# Altium PCB PCB1.PcbDoc (part 3 of 3)
Units mil, origin at the board's own origin, x right, y up, seen from the top; angles counter-clockwise.
Board outline 3631 x 2044 mil, 4 copper layers (Top Layer, GND1, GND2, Bottom Layer), stack 62.449 mil thick; 138 components, 90 nets, 471 pads, 514 vias.
Unrouted connection lines stored in the file: 16.
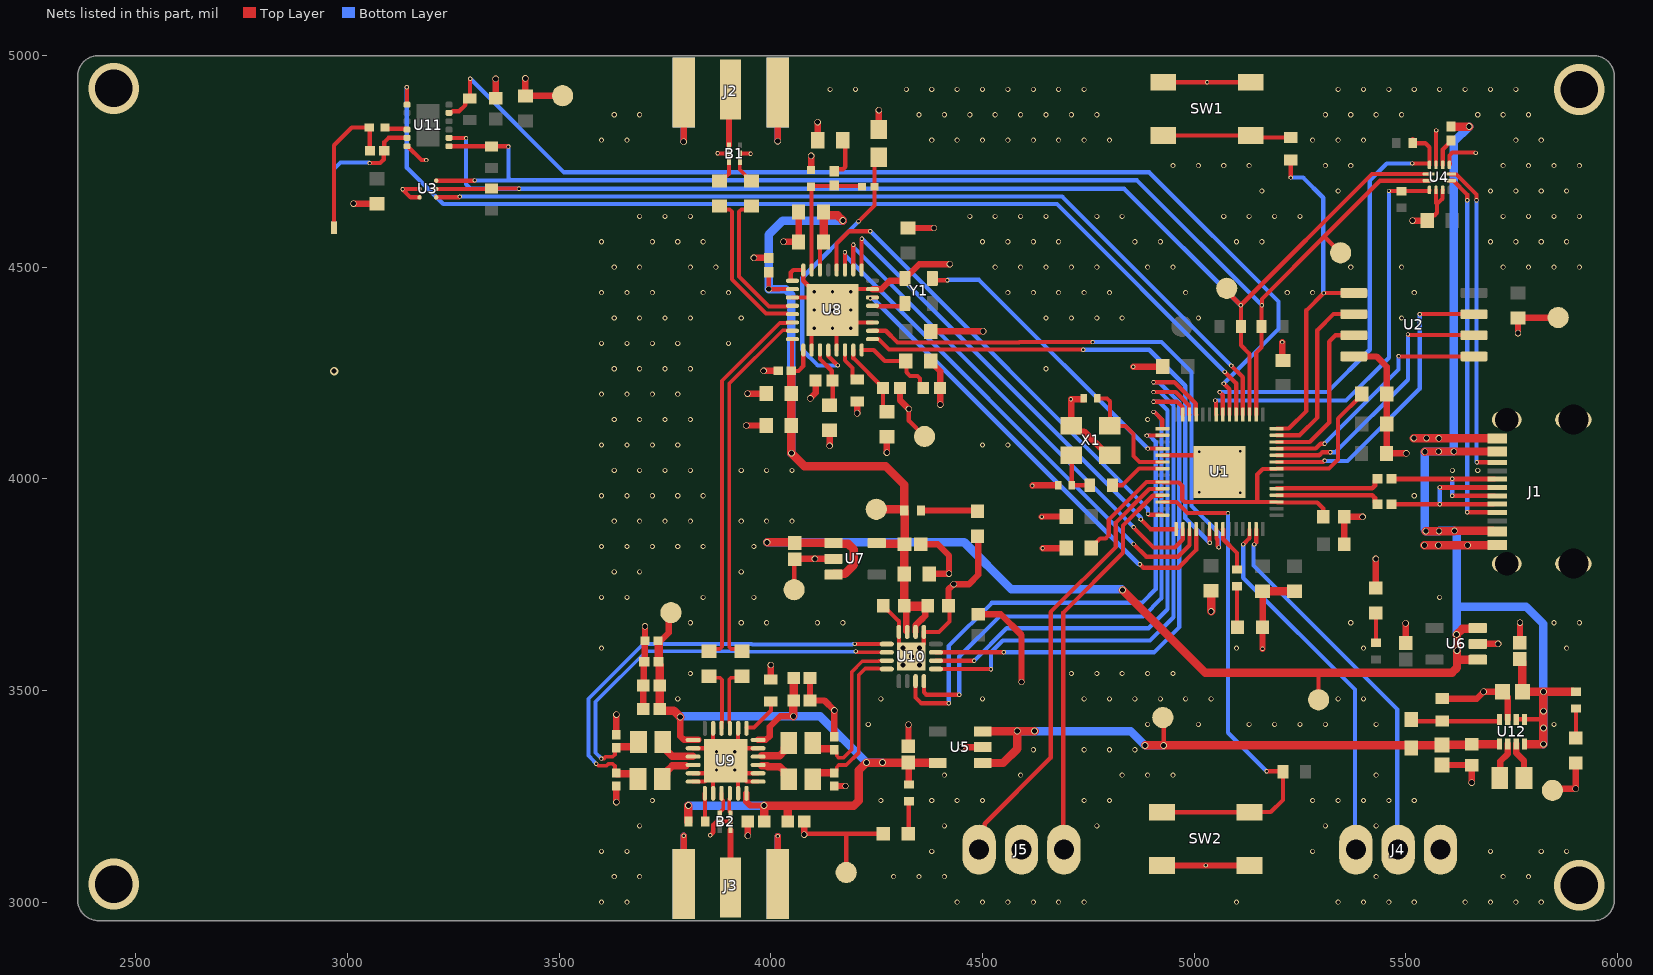
[diagram p4: the nets of this part, all layers, seen from the top]

## Via types
v1: diameter 12, hole 8, Top Layer to Bottom Layer, 299 vias
v2: diameter 10, hole 6, Top Layer to Bottom Layer, 100 vias
v3: diameter 15, hole 12, Top Layer to Bottom Layer, 60 vias
v4: diameter 16, hole 12, Top Layer to Bottom Layer, 32 vias
v5: diameter 19.68, hole 7.87, Top Layer to Bottom Layer, 13 vias
v6: diameter 19.68, hole 11.81, Top Layer to Bottom Layer, 5 vias
v7: diameter 120, hole 88, Top Layer to Bottom Layer, 4 vias
v8: diameter 20, hole 12, Top Layer to Bottom Layer, 1 vias

## Nets (pads, with @x,y where several pads share a name; then routed paths per layer and width w, separated by ;. In a path a pad name is that pad's centre, name@x,y a point inside that pad or via, vN(x,y) a via of type N, cw(c..) or ccw(c..) an arc to the next point about the centre after c; other vN are vias at no path point) (continued)
+3V3A: C23.1 C30.1 C31.1 C32.1 C33.1 C51.1 C52.1 C54.1 C63.2 C64.1 R16.2 TP8.1 U7.5 U8.6 U8.10 U8.16 U8.17 U10.2 U10.3 | length 2341.6
  Top Layer w10: C64.1@3995,4488.13 v4(3995,4448) 4019.01,4448 4019.12,4448.11 U8.10@4051.02,4448.11 ; U8.16@4051.02,4330 4049.77,4330 4049.69,4329.92 4049.69,4256.33 C63.2@4048.35,4255 4065.14,4255 4076.61,4266.47 U8.17@4076.61,4304.41 ; U8.6@4115.98,4493.39 4115.98,4551.46 C33.1@4124.53,4560
  Top Layer w15: C51.1@4315,3700 C51.1@4320.1,3694.9 ; U10.3@4320.1,3640.22 C51.1@4320.1,3694.9 ; U10.2@4341.77,3638.23 4341.77,3653.82 4354.45,3666.5 4354.63,3666.5 4364.64,3676.51 4364.64,3691.51 C54.1@4368.02,3694.9 ; C54.1@4376,3694.9 C54.1@4368.02,3694.9 ; C51.1@4320.1,3694.9 C54.1@4368.02,3694.9
  Top Layer w20: C63.2@4048.51,4253.94 C31.1@4048.51,4201.1 C32.1@4048.51,4126.1 v4(4048.51,4060.49) 4079,4030 4271,4030 4315.31,3985.68 R16.2@4315.31,3925 ; C33.1@4124.53,4560 C30.1@4124.53,4630 ; C30.1@4124.53,4628.03 4130.28,4622.28 4157.72,4622.28 v4(4170,4610) ; TP8.1@4249,3928 4313.97,3928 4315.31,3926.65 R16.2@4315.31,3925 ; U7.5@4250.18,3848.4 4251.88,3846.7 4314.05,3846.7 C23.1@4315.75,3845 ; C54.1@4370.32,3700 C51.1@4315,3700 4315.24,3700.24 4315.24,3774.76 C52.1@4315.47,3775 4315.61,3775.14 4315.61,3844.86 C23.1@4315.75,3845 ; R16.2@4315.31,3925 4315.31,3923.35 4315.75,3922.91 C23.1@4315.75,3845
  Bottom Layer w20: v4(4048.51,4060.49) 4048.51,4434.49 4034.89,4448.11 4015,4448.11 4014.89,4448 v4(3995,4448) 3995,4577 4028,4610 v4(4170,4610)
+5: C17.1 C55.2 C56.2 C57.2 C58.2 C59.2 C60.2 C65.1 C66.2 R15.2 R22.2 TP6.1 U5.5 U9.6 U9.13 U9.24 | length 2033
  Top Layer w15: C66.2@3733.23,3611.57 3734.02,3611.57 3758.94,3636.5 3758.94,3678.94 TP6.1@3764,3684 ; v4@3786,3436.73 3786,3392 3794.79,3383.21 U9.13@3829,3383.21 ; U9.24@3942.21,3257.23 3942.21,3236.98 3951,3228.19 3983.81,3228.19 v4(3984,3228) ; U9.6@3969.77,3383.21 3988.21,3383.21 3997,3392 3997,3414 4022,3439 v4(4053,3439) ; C17.1@4325,3329.75 4325.5,3329.25 4325.5,3278.18 R15.2@4326,3277.68
  Top Layer w20: C66.2@3734.02,3611.57 3734.75,3610.84 C65.1@3734.75,3561.57 ; C65.1@3735.59,3561.57 3737.17,3560 C58.2@3737.17,3511.57 C57.2@3737.17,3456.57 3741.34,3452.4 3770.6,3452.4 v4(3786,3437) ; v4(3805,3228) 3805.32,3227.68 R22.2@3805.32,3190 ; C59.2@3984.29,3190 3984.29,3227.71 v4(3984,3228) 4045,3228 ; C60.2@4040,3190 4040,3223 4045,3228 ; v4(4053,3439) 4053,3475.41 C55.2@4054,3476.41 C56.2@4054,3530 ; U5.5@4393.85,3328.6 4393.28,3329.17 4325.58,3329.17 C17.1@4325,3329.75 v4(4264,3329.75) v4(4225.75,3329.75) 4208,3312 4208,3239.72 4196.28,3228 4045,3228
  Bottom Layer w20: v4(3786,3437) 3788,3439 v4(4053,3439) 4116.5,3439 v4(4225.75,3329.75) v4(4264,3329.75) ; v4(3805,3228) v4(3984,3228)
CC1: J1.A5 U4.1 | length 866.7
  Top Layer w10: U4.1@5605,4704.25 5612.72,4704.25 5645,4671.97 v2(5645,4658) ; v2(5645,3921) 5645.21,3920.79 J1.A5@5707.24,3920.79
  Bottom Layer w10: v2(5645,3921) v2(5645,4658)
CC2: J1.B5 U4.2 | length 754.3
  Top Layer w10: U4.2@5605,4720 5606.06,4718.94 5619.61,4718.94 5667,4671.54 v2(5667,4658) ; v2(5668,4039) 5668.1,4038.9 J1.B5@5707.24,4038.9
  Bottom Layer w10: v2(5667,4658) 5667,4040 v2(5668,4039)
cpout: C34.1 C35.1 R18.1 U8.7 | length 320.2
  Top Layer w10: U8.7@4096.3,4493.39 4096.22,4493.46 4096.22,4689.09 C35.1@4095,4690.31 4096.41,4691.72 4148.59,4691.72 C34.1@4150,4693.13 4151.56,4691.56 4213.67,4691.56 R18.1@4215.24,4690
flash_cs: R7.1 U1.56 U2.1 | length 817.4
  Top Layer w10: U1.56@5195.12,4118.6 5223.6,4118.6 5265,4160 5265,4398 v2(5306,4439) U2.1@5377.25,4439.05 ; v2(5228.35,4711.53) R7.1@5228.35,4752.89
  Bottom Layer w10: v2(5228.35,4711.53) 5257.47,4711.53 5305,4664 5305,4440 v2(5306,4439)
GND: B1.2 B1.5 B2.2 B2.5 C1.2 C2.2 C3.2 C4.2 C5.2 C6.2 C7.2 C8.2 C9.2 C10.2 C11.2 C12.2 C13.2 C14.2 C15.2 C16.2 C17.2 C18.2 C19.2 C20.2 C21.2 C22.2 C23.2 C28.2 C29.2 C30.2 C31.2 C32.2 C33.2 C35.2 C36.2 C37.2 C38.1 C39.2 C40.1 C41.2 C42.1 C44.2 C46.2 C47.1 C48.1 C49.1 C50.1 C51.2 C52.2 C53.2 C54.2 C55.1 C56.1 C57.1 C58.1 C59.1 C60.1 C61.2 C62.2 C63.1 C64.2 C65.2 C66.1 D1.1 D2.1 D3.1 D4.1 D5.1 J1.1 J1.2 J1.3 J1.4 J1.A1-B12 J1.B1-A12 J2.2 J2.3 J2.4 J2.5 J3.2 J3.3 J3.4 J3.5 J4.1 J5.2 R2.2 R19.1 R20.1 R24.1 SW1.3 SW1.4 SW2.3 SW2.4 TP2.1 TP9.1 TP10.1 TP11.1 TP12.1 TP13.1 U1.19 U1.57 U2.4 U3.B1 U3.C1 U4.3 U4.5 U4.10 U4.11 U5.2 U6.2 U7.2 U8.8 U8.9 U8.11 U8.18 U8.21 U8.27 U8.31 U8.33 U9.1 U9.2 U9.5 U9.8 U9.11 U9.14 U9.17 U9.18 U9.20 U9.23 U9.25 U10.1 U10.4 U10.17 U11.6 U12.7 X1.2 X1.4 Y1.2 | length 8960.5
  Top Layer w10: U11.6@3140.39,4785.79 3141.77,4785.79 3174.56,4753 v2(3186,4753) ; U3.C1@3170,4665 3149,4665 v2(3130,4684) 3130.68,4684.69 U3.B1@3170,4684.69 ; U9.18@3816.23,3284.79 3816.31,3284.87 3843.87,3284.87 U9.25@3863.47,3304.47 ; U9.17@3816.23,3304.47 U9.25@3863.47,3304.47 ; U9.14@3816.23,3363.53 3863.47,3363.53 U9.11@3863.47,3410.77 ; v2(3857,3158) 3863.88,3164.88 3863.88,3182.49 3871.63,3190.24 3879.33,3190.24 B2.5@3879.41,3190.32 B2.2@3905,3190.32 ; U9.20@3863.47,3257.23 U9.25@3863.47,3304.47 ; v2(3874,4769) 3874.49,4768.51 B1.2@3901.1,4768.51 ; U9.25@3893,3334 U9.25@3922.53,3304.47 ; U9.23@3922.53,3257.23 U9.25@3922.53,3304.47 ; U9.8@3922.53,3410.77 3922.53,3363.53 U9.5@3969.77,3363.53 ; B1.5@3926.69,4768.51 3951.49,4768.51 v2(3952,4768) ; C59.1@3945.55,3190.16 C59.1@3945.71,3190 ; U9.1@3969.77,3284.79 3969.69,3284.87 3942.13,3284.87 U9.25@3922.53,3304.47 ; U9.2@3969.77,3304.47 U9.25@3922.53,3304.47 ; U8.11@4051.02,4428.43 U8.33@4115.98,4428.43 ; U8.9@4051.02,4467.8 4047.08,4467.8 4047,4467.87 4047,4487.53 4052.86,4493.39 U8.8@4076.61,4493.39 4076.61,4467.8 v5(4102.2,4442.2) U8.33@4115.98,4428.43 ; TP11.1@4055,3738 4055,3809 C22.2@4056,3810 ; v3(4078.58,3159.42) 4079.54,3160.37 4083.07,3160.37 4084.12,3161.42 D3.1@4265.75,3161.42 ; U8.18@4096.3,4304.41 4096.3,4349.69 v5(4102.2,4355.59) ; v5(4145.51,4398.9) U8.33@4115.98,4428.43 ; U8.21@4155.35,4304.41 4155.35,4389.06 4175.04,4369.37 U8.27@4240,4369.37 ; TP9.1@4178,3070 4178,3158.36 ; v5(4188.82,4442.2) 4194.72,4448.11 U8.31@4240,4448.11 ; C51.2@4265.63,3700 4265.63,3698.94 4275.55,3689.01 4276.62,3689.01 4302.4,3663.23 U10.4@4302.4,3638.23 4302.6,3638.03 4302.6,3609.49 v6(4312.24,3599.84) ; v3(4326,4165) 4326,4137 TP10.1@4363,4100 ; v6(4351.61,3599.84) 4361.26,3609.49 4361.26,3638.03 U10.1@4361.46,3638.23 4397.23,3638.23 4422,3663 4422,3697.68 C54.2@4419.68,3700 ; U1.19@4924.65,4055.61 U1.57@5020.51,4055.61 ; SW1.4@4927.17,4937.01 v2(5030.51,4937.01) SW1.3@5133.86,4937.01 ; v2(5012.24,4064) 5012.24,4063.88 U1.57@5020.51,4055.61 ; v2(5059.88,4016.24) U1.57@5020.51,4055.61 ; C62.2@5550.47,4610.26 5550.47,4611.97 5561.22,4622.72 5568.14,4622.72 5574,4628.57 5574,4648.86 ; U4.10@5571.54,4682.6 5571.54,4651.32 5574,4648.86 ; U4.5@5571.54,4741.65 5571.54,4822.54 v2(5572,4823) ; U4.11@5587.28,4682.6 5587,4682.31 5587,4661.86 5574,4648.86 ; U4.3@5604.09,4745 5603.03,4743.94 U4.3@5603.03,4741.65 5603.03,4764.03 5610,4771 5664,4771 v2(5665,4770)
  Top Layer w15: v3(3014,4650) C61.2@3069.37,4650 ; C44.2@3350,4899.37 v3(3350,4945) ; v3(3420,4946) C46.2@3420,4904.53 3420.24,4904.76 3507.76,4904.76 TP12.1@3508,4905 ; v3(3635,3236) C49.1@3635,3274.29 ; C50.1@3635,3395.71 v3(3635,3443) ; C57.1@3698.58,3456.57 C58.1@3698.58,3511.57 3699.79,3512.78 3699.79,3560.37 3701.76,3562.33 3701.76,3610.82 3702.52,3611.57 v3(3702.52,3651.48) ; J3.2@3793.78,3042.87 3793.78,3156.78 v2(3794,3157) ; v3(3793.78,4796.22) J2.3@3793.78,4912.13 ; v3(3941.9,4126.1) C32.2@3989.46,4126.1 ; v3(3944.9,4201.1) C31.2@3989.46,4201.1 ; v3(3945.71,3156.71) C59.1@3945.71,3190 ; v3(3959.87,4521.87) C64.2@3995,4521.87 ; v3(3983,4255) C63.1@4017.65,4255 ; R24.1@4000,3525.59 v3(4000,3560) ; v2(4016,3156) 4016.22,3155.78 J3.3@4016.22,3042.87 ; v3(4016.22,4797.78) J2.2@4016.22,4912.13 ; v3(4030,4560) C33.2@4065.47,4560 C30.2@4065.47,4630 ; C22.2@4056,3810 4057,3811 v3(4104,3811) U7.2@4147.82,3811 ; v3(4078.58,3159.42) C60.1@4078.58,3190 ; C56.1@4092.58,3530 C55.1@4092.58,3476.41 4126.59,3476.41 v3(4150,3453) C48.1@4150,3390.35 ; v3(4093,4190) 4105.92,4202.92 C38.1@4105.92,4232 ; C35.2@4095,4729.69 v3(4095,4762.84) ; R20.1@4110.47,4800 v3(4110.47,4842.47) ; v3(4138.9,4077.9) C37.2@4138.9,4114.46 ; C47.1@4150,3274.29 v3(4176.29,3274.29) ; v3(4203.9,4154.9) R19.1@4203.9,4182.92 ; U8.31@4240,4448.11 4261.19,4448.11 4281.12,4468.04 Y1.2@4316.42,4468.04 ; C36.2@4255,4825.1 v3(4255,4871) ; v3(4273.9,4061.9) C41.2@4273.9,4098.98 ; C42.1@4305,4215 4305,4186 v3(4326,4165) ; Y1.2@4316.42,4472.96 4350.46,4507 v3(4423,4507) ; C29.2@4324,4592.53 v3(4385.47,4592.53) ; C17.2@4325,3368.25 v3(4325,3419) ; C23.2@4354.25,3845 4394,3845 4421,3818 v3(4421,3776) 4375.53,3776 C52.2@4374.53,3775 ; C39.2@4377.95,4278.51 4377.95,4276.54 4400.16,4254.34 C40.1@4400.16,4215 v3(4400.16,4175.16) ; C28.2@4377.95,4348.51 v3(4501.49,4348.51) ; C54.2@4419.68,3700 4419.68,3738.68 v3(4432,3751) 4467.97,3751 4490,3773.03 4490,3862.36 D4.1@4488.19,3864.17 ; v3(4450,3366) U5.2@4500.15,3366 ; C53.2@4490,3679.68 4543.32,3679.68 4592,3631 v3(4592,3520) ; v2(4618,3984) 4619,3985 C15.2@4679.25,3985 ; v2(4640,3910) 4641,3911 C4.2@4698,3911 ; v2(4642,3836) C11.2@4698,3836 ; C14.2@4739.25,4190 4739.25,4188.37 4738.88,4188 v2(4709,4188) 4710,4187 X1.2@4710,4125 4723.17,4111.83 4739.9,4111.83 4795.63,4056.1 X1.4@4800.55,4056.1 ; v2(4856,4265) C3.2@4925.47,4265 ; SW2.3@4924.21,3086.61 v2@5026.42,3086.61 ; v2(5027.56,3086.61) v2@5026.42,3086.61 ; SW2.4@5130.91,3086.61 v2@5026.42,3086.61 ; v2(5161.42,3598.43) D1.1@5161.42,3649.61 5161.71,3649.9 5161.71,3734.18 C6.2@5162,3734.47 ; v2(5208,4323) 5208,4281.53 C2.2@5210,4279.53 ; C9.2@5355,3845 5354.68,3845.32 5354.68,3909.68 C10.2@5354.37,3910 v3(5398,3910) ; U2.4@5377.25,4289.05 5430.95,4289.05 5455,4265 C12.2@5455,4200 C8.2@5455,4130 5454.76,4129.76 5454.76,4060.24 C7.2@5454.53,4060 v3(5501,4060) ; D5.1@5429.13,3742.13 v3(5429.13,3811.02) ; C21.2@5499.69,3611.79 v3(5499.69,3658.68) ; v3(5515.84,4610) C62.2@5550.47,4610 ; C18.2@5585.8,3324.32 5586.32,3323.8 5655.28,3323.8 C19.2@5655.8,3323.28 v3(5655.8,3282.2) ; R2.2@5586,3480.64 5667.64,3480.64 v3(5684,3497) C16.2@5728.36,3497 5740.96,3484.37 U12.7@5740.96,3431.91 ; U6.2@5670,3610 v3(5718,3610) ; v3(5765,4344) C13.2@5765,4380 5765.5,4380.5 5859.5,4380.5 TP13.1@5860,4381 ; C20.2@5769.69,3612.54 v3(5769.69,3660.32) ; TP2.1@5846.46,3263.78 5850.39,3267.72 v3(5901.57,3267.72) D2.1@5901.57,3328.74
  Top Layer w20: v3(5040,3687) C5.2@5040,3735.47 ; C6.2@5162,3734.47 C1.2@5237,3734.47 ; v3(5519,4096) v3(5549,4096) 5549.53,4095.47 v3(5578,4095.47) ; v3(5544,3843) v3(5577,3843) v3(5646.25,3843) 5715.5,3843 J1.A1-B12@5716,3843.5 ; v3@5578.3,4095.47 J1.B1-A12@5716,4095.47
  Bottom Layer w15: J3.4@3793.78,3042.87 3793.78,3156.78 v2(3794,3157) ; v3(3793.78,4796.22) J2.5@3793.78,4912.13 ; v2(4016,3156) 4016.22,3155.78 J3.5@4016.22,3042.87 ; v3(4016.22,4797.78) J2.4@4016.22,4912.13
  other v1: 3600,3000 3660,3000 4440,3000 4500,3000 4560,3000 4620,3000 4680,3000 4740,3000 5100,3000 5340,3000 5400,3000 5460,3000 5520,3000 5640,3000 5700,3000 5760,3000 5820,3000 3630,3060 3690,3060 4290,3060 4350,3060 4410,3060 5430,3060 5730,3060 5790,3060 3600,3120 3660,3120 4380,3120 5280,3120 5700,3120 5820,3120 5880,3120 3690,3180 4410,3180 4770,3180 5310,3180 5430,3180 3720,3240 4260,3240 4380,3240 4440,3240 4500,3240 4740,3240 4800,3240 5280,3240 5340,3240 5400,3240 5460,3240 5520,3240 4410,3300 4590,3300 4830,3300 4890,3300 4950,3300 5430,3300 4620,3360 4740,3360 4800,3360 4860,3360 4230,3420 4890,3420 5010,3420 5130,3420 5190,3420 5250,3420 5310,3420 5430,3420 5850,3420 3780,3480 4260,3480 4500,3480 4740,3480 4800,3480 4860,3480 4920,3480 4980,3480 5040,3480 5340,3480 5400,3480 3810,3540 4710,3540 4770,3540 4830,3540 4890,3540 4950,3540 3600,3600 5100,3600 5400,3600 5880,3600 3810,3660 3930,3660 3990,3660 4110,3660 4170,3660 5370,3660 5850,3660 5910,3660 3600,3720 3660,3720 3840,3720 3960,3720 5580,3720 3630,3780 3690,3780 3930,3780 3600,3840 3660,3840 3720,3840 3780,3840 3840,3840 3960,3840 3630,3900 3690,3900 3750,3900 3810,3900 3930,3900 3990,3900 4050,3900 3600,3960 3660,3960 3720,3960 3780,3960 3840,3960 5520,3960 3630,4020 3690,4020 3750,4020 3810,4020 3930,4020 3990,4020 4050,4020 5610,4020 5670,4020 3600,4080 3660,4080 3720,4080 3780,4080 4500,4080 4560,4080 3630,4140 3690,4140 3750,4140 3810,4140 4890,4140 3600,4200 3660,4200 3720,4200 3780,4200 3630,4260 3690,4260 3750,4260 3810,4260 4650,4260 3600,4320 3660,4320 3720,4320 3780,4320 3900,4320 3630,4380 3690,4380 3750,4380 3810,4380 3930,4380 4650,4380 4710,4380 4770,4380 4830,4380 5010,4380 5490,4380 3600,4440 3660,4440 3720,4440 3840,4440 3900,4440 4560,4440 4620,4440 4680,4440 4740,4440 4800,4440 4980,4440 5220,4440 5280,4440 5520,4440 3630,4500 3690,4500 3810,4500 3870,4500 4530,4500 4590,4500 4650,4500 4710,4500 4770,4500 4890,4500 4950,4500 5370,4500 5490,4500 5730,4500 5790,4500 5850,4500 5910,4500 3600,4560 3720,4560 3780,4560 3840,4560 4500,4560 4560,4560 4620,4560 4680,4560 4860,4560 4920,4560 5100,4560 5160,4560 5700,4560 5760,4560 5820,4560 5880,4560 3690,4620 3750,4620 3810,4620 4470,4620 4530,4620 4590,4620 4650,4620 4770,4620 4830,4620 5070,4620 5130,4620 5190,4620 5250,4620 5730,4620 5790,4620 5850,4620 5910,4620 5160,4680 5340,4680 5700,4680 5760,4680 5820,4680 5880,4680 4950,4740 5010,4740 5070,4740 5130,4740 5310,4740 5370,4740 5730,4740 5790,4740 5850,4740 5910,4740 3600,4800 3660,4800 4380,4800 4440,4800 4500,4800 4560,4800 4620,4800 4680,4800 4740,4800 4800,4800 5280,4800 5340,4800 5400,4800 5760,4800 5820,4800 3630,4860 3690,4860 4350,4860 4410,4860 4470,4860 4530,4860 4590,4860 4650,4860 4710,4860 4770,4860 5310,4860 5370,4860 5430,4860 5490,4860 5670,4860 5730,4860 5790,4860 4140,4920 4200,4920 4320,4920 4380,4920 4440,4920 4500,4920 4560,4920 4620,4920 4680,4920 4740,4920 5340,4920 5400,4920 5460,4920 5520,4920 5580,4920 5640,4920 5700,4920 5760,4920
  other v2: 5109,3967.12 5012.24,3968 5108.65,4065
  other v5: 3871.57,3312.19 3914.88,3312.19 3871.57,3355.5 3914.88,3355.5 4145.51,4355.59 4188.82,4355.59 4102.2,4398.9 4188.82,4398.9 4145.51,4442.2
  other v6: 4312.24,3560.47 4351.61,3560.47 4331.93,3580.16
  other v7: 5910,3040 2447.59,3042.42 5910,4920 2447.59,4922.42
I_N: C48.2 L4.2 U10.7 | length 420.4
  Top Layer w8.86: L4.2@4099.22,3376 4099.22,3375.02 4112.42,3361.82 L4.2@4114.59,3359.65 ; C48.2@4150,3359.65 4155.81,3353.84 4155.81,3345.94 4161,3340.75 4171.16,3340.75 4191,3360.59 4191,3543.84 4216.06,3568.9 4254.32,3568.9 4255.32,3569.9 4273.44,3569.9 U10.7@4273.86,3570.31
  Top Layer w17.7: L4.2@4099.22,3375.02 4099.22,3372.77 4110.17,3361.82 4112.42,3361.82 4148.61,3361.82 4150,3360.43 C48.2@4150,3359.65
I_O_N: L4.1 U9.4 | length 102.5
  Top Layer w8.86: L4.1@4026.67,3360.63 L4.1@4042.04,3376
  Top Layer w17.7: U9.4@3979,3345.6 3990.16,3345.6 3990.41,3345.85 4020.72,3345.85 4031.09,3356.22 4031.09,3365.05 L4.1@4042.04,3376
I_O_P: L2.1 U9.3 | length 103.2
  Top Layer w8.86: L2.1@4026.67,3305.37 L2.1@4042.04,3290
  Top Layer w17.7: U9.3@3979,3322.09 3990.97,3322.09 3992.9,3320.15 4020.72,3320.15 4031.09,3309.78 4031.09,3300.95 L2.1@4042.04,3290
I_P: C47.2 L2.2 U10.8 | length 419.3
  Top Layer w8.86: L2.2@4099.22,3290 L2.2@4114.22,3305 ; C47.2@4150,3305 4155.81,3310.81 4155.81,3318.7 4161,3323.89 4178.15,3323.89 4207.86,3353.61 4207.86,3536.86 4223.04,3552.04 4254.32,3552.04 4255.32,3551.04 4273.44,3551.04 U10.8@4273.86,3550.63
  Top Layer w17.7: L2.2@4099.22,3290 4099.22,3294.05 4110.17,3305 4114.22,3305 C47.2@4150,3305
IQ_EN_N: R24.2 U9.7 | length 100.4
  Top Layer w10: U9.7@3942.52,3412.35 3960,3412.35 4000.43,3452.79 4000.43,3471.25 R24.2@4005.59,3476.41
NetANT1_1: ANT1.1 C43.2 C45.1 C45.2 U11.5 | length 718.4
  Top Layer w10: ANT1.1@2968,4593 2968,4788 3010,4830 C43.2@3051.3,4830 3052.21,4829.09 3052.21,4775.91 C45.2@3053.13,4775 C45.2@3053.97,4775 ; v2(3052,4746) 3077,4746 3085.59,4754.59 3085.59,4773.72 C45.1@3086.87,4775 3086.87,4795.87 3096.47,4805.47 U11.5@3140.39,4805.47
  Bottom Layer w10: ANT1.1@2968,4593 2968,4732 2983,4747 3051,4747 v2(3052,4746)
  other v8: 2968,4254.42
NetB1_1: B1.1 J2.1 | length 133.4
  Top Layer w13.75: B1.1@3901.1,4788.2 3901.1,4916.1 J2.1@3905,4920
NetB1_3: B1.3 C25.2 | length 57.8
  Top Layer w8.86: C25.2@3878.9,4703.51 3890.22,4714.83 3895.91,4714.83 3901.1,4720.02 B1.3@3901.1,4748.83
NetB1_4: B1.4 C24.2 | length 57.7
  Top Layer w8.86: B1.4@3926.69,4748.83 3926.69,4730.72 3940.61,4716.8 3940.61,4714.83 3951.93,4703.51 C24.2@3953.9,4703.51
NetB2_1: B2.1 J3.1 | length 135.6
  Top Layer w13.75: J3.1@3905,3035 B2.1@3905,3170.63
NetC10_1: C10.1 C11.1 C12.1 U1.23 U1.45 U1.50 | length 1148.1
  Top Layer w10: C11.1@4757.06,3836 4757.06,3837.97 4777.89,3858.8 4790.93,3858.8 4798,3865.87 4798,3903 4887.62,3992.61 U1.23@4924.65,3992.61 4925.71,3991.55 4963.45,3991.55 4972,3983 4972,3951.23 4977.86,3945.37 5149,3945.37 ; C10.1@5305,3910 5305,3930 5290.69,3944.31 5196.18,3944.31 U1.45@5195.12,3945.37 5149,3945.37 ; C12.1@5395.94,4200 5395.94,4198.03 5340,4142.09 5340,4045.8 5318.31,4024.11 U1.50@5195.12,4024.11 5194.06,4023.05 5162.05,4023.05 5149,4010 5149,3945.37
NetC14_1: C14.1 U1.20 X1.1 | length 281.2
  Top Layer w10: C14.1@4770.75,4190 4794,4190 4801,4183 4801,4125.45 X1.1@4800.55,4125 4838,4125 4857,4106 4857,4054 4871.14,4039.86 U1.20@4924.65,4039.86
NetC15_1: C15.1 R3.1 X1.3 | length 114
  Top Layer w10: X1.3@4710,4056.1 4710.75,4055.36 C15.1@4710.75,3985 R3.1@4753.36,3985
NetC18_1: C18.1 C19.1 R1.2 TP5.1 U5.1 U5.3 U12.1 | length 1517.6
  Top Layer w10: v4(4928,3370) TP5.1@4928,3434
  Top Layer w20: U5.1@4500.15,3328.6 4548.6,3328.6 4582,3362 v4(4582,3404) ; U5.3@4500.15,3403.4 4581.4,3403.4 v4(4582,3404) ; v4(4623,3404) v4(4582,3404) ; v4@4884,3370.53 4928,3370.53 5510.8,3370.53 5511.35,3371.07 5585.26,3371.07 C18.1@5585.8,3371.61 5586.32,3372.13 5655.28,3372.13 C19.1@5655.8,3372.65 5713,3372.65 ; TP5.1@4926,3436 TP5.1@4928,3434
  Bottom Layer w20: v4(4582,3404) v4(4623,3404) 4850,3404 v4(4884,3370) v4(4928,3370)
NetC34_2: C34.2 R20.2 | length 95.8
  Top Layer w10: C34.2@4150,4726.87 4154.45,4731.33 4170.14,4731.33 4176,4737.18 4176,4793.53 R20.2@4169.53,4800
NetC43_1: C43.1 U11.4 | length 53.7
  Top Layer w10: C43.1@3088.7,4830 3091.65,4827.05 3138.5,4827.05 U11.4@3140.39,4825.16
NetD1_2: D1.2 R6.1 | length 98.7
  Top Layer w10: D1.2@5101,3648.82 R6.1@5101,3746.32 ; D1.2@5102.15,3640.13 D1.2@5102.97,3640.94
NetD2_2: D2.2 R12.1 | length 67.7
  Top Layer w10: R12.1@5902,3457.32 5902,3391 D2.2@5903,3390
NetD3_2: D3.2 R15.1 | length 79.1
  Top Layer w10: D3.2@4324,3160 4326,3162 R15.1@4326,3238.32
NetD4_2: D4.2 R16.1 | length 135.8
  Top Layer w15: R16.1@4354.69,3925 4488.82,3925 D4.2@4490,3923.82
NetD5_2: D5.2 R17.1 | length 75.3
  Top Layer w10: R17.1@5429.69,3612.98 D5.2@5429.69,3688.29
NetJ4_2: J4.2 U1.41 | length 904.9
  Top Layer w10: v2(5142,3845) 5146.5,3849.5 U1.41@5146.5,3881
  Bottom Layer w10: v2(5142,3845) 5140,3843 5140,3795 5480,3455 J4.2@5480,3119.66
NetJ4_3: J4.3 U1.40 | length 878.3
  Top Layer w10: v2(5116,3845) 5130.75,3859.75 U1.40@5130.75,3881
  Bottom Layer w10: v2(5116,3845) 5116,3766 5380,3502 J4.3@5380,3118.11
NetL1_1: L1.1 U12.3 | length 88.8
  Top Layer w15: U12.3@5760.65,3374.03 5760.65,3352.35 5779.39,3333.61 L1.1@5779.39,3292.97
NetL1_2: L1.2 U12.2 | length 88.8
  Top Layer w15: L1.2@5722.22,3292.97 5723.43,3294.19 5723.43,3332.43 5740.96,3349.96 U12.2@5740.96,3374.03
NetR1_1: R1.1 R2.1 U12.8 | length 212.8
  Top Layer w10: R1.1@5513,3425.56 5514.8,3427.36 R2.1@5586,3427.36 5719.98,3427.36 5721.28,3428.66 U12.8@5721.28,3431.91
NetR3_2: R3.2 U1.21 | length 134.2
  Top Layer w10: R3.2@4806.64,3985 4831,3985 4870.11,4024.11 U1.21@4924.65,4024.11
NetR6_2: R6.2 U1.36 | length 109.1
  Top Layer w10: U1.36@5067.76,3881 5068.82,3879.94 5068.82,3862.21 ; 5068.84,3862.19 5068.84,3857.16 5101,3825 R6.2@5101,3785.68
NetR7_2: R7.2 SW1.1 SW1.2 | length 303.2
  Top Layer w10: SW1.2@4927.17,4811.02 SW1.1@5133.86,4811.02 5138.71,4806.17 R7.2@5228.35,4806.17
NetR11_1: R11.1 U1.8 U4.9 | length 978.5
  Top Layer w10: v2(5049.91,4185) 5051.91,4183.01 5051.91,4151.57 U1.8@5052.01,4151.47 ; v2(5460,4680) 5460.31,4679.69 R11.1@5490,4679.69 5554.72,4679.69 5555.79,4680.75 U4.9@5555.79,4682.6
  Bottom Layer w10: v2(5049.91,4185) 5359,4185 5460,4286 v2(5460,4680)
NetR13_1: R13.1 U1.7 U4.6 | length 1107.6
  Top Layer w10: v2(5060,4205) 5067.76,4197.24 U1.7@5067.76,4151.47 ; v2(5515,4745) 5554.72,4745 5555.79,4743.94 U4.6@5555.79,4741.65 5555.79,4783.21 5546,4793 R13.1@5516.69,4793 R13.1@5516.69,4802.42
  Bottom Layer w10: v2(5060,4205) 5060.23,4204.77 5314.77,4204.77 5415,4305 5415,4705 5455,4745 v2(5515,4745)
NetR14_2: R14.2 U4.4 | length 65.3
  Top Layer w10: U4.4@5587.28,4741.65 5587.28,4777.91 5607.13,4797.76 R14.2@5607.13,4798.74
NetR21_1: R21.1 U1.6 U11.11 | length 2568.6
  Top Layer w10: U11.11@3239.61,4864.53 3241.5,4866.42 3246.83,4866.42 3248.73,4868.32 3263.08,4868.32 3278.25,4883.5 3278.25,4891.78 3285.06,4898.59 R21.1@3289,4898.59 3289,4944 v2(3290,4945) ; v2(5070,4225) 5083.5,4211.5 U1.6@5083.5,4151.47
  Bottom Layer w10: v2(3290,4945) 3511,4724 4894,4724 5199,4419 5199,4354 v2(5070,4225)
NetR22_1: R22.1 U9.19 | length 67.6
  Top Layer w10: U9.19@3843.79,3257.23 3843.79,3244.59 3844.68,3243.69 R22.1@3844.68,3190
NetU1_5: U1.5 U11.1 | length 2475.4
  Top Layer w10: v2(3140,4925) 3140.39,4924.61 U11.1@3140.39,4884.21 ; v2(5072.38,4252.62) 5099.25,4225.75 U1.5@5099.25,4151.47
  Bottom Layer w10: v2(3140,4925) 3140,4735 3226,4649 4676,4649 v2(5072.38,4252.62)
NetU1_11: U1.11 U10.15 | length 1357.8
  Top Layer w10: U10.15@4390,3590 v2(4550,3590) ; v2(4904,4228) 4953.21,4228 5003.7,4177.51 5003.7,4152.54 U1.11@5004.76,4151.47
  Bottom Layer w10: v2(4550,3590) 4905,3590 4965,3650 4965,4180 4917,4228 v2(4904,4228)
NetU1_12: U1.12 U10.13 | length 1315.6
  Top Layer w10: U10.13@4390,3550.63 4519.37,3550.63 v2(4520,3550) ; v2(4904,4205) 4956.41,4205 4987.95,4173.46 4987.95,4152.54 U1.12@4989.02,4151.47
  Bottom Layer w10: v2(4520,3550) 4520,3590.2 4547.8,3618 4896,3618 4951,3673 4951,4173.23 4919.23,4205 v2(4904,4205)
NetU1_13: U1.13 U10.14 | length 1200.7
  Top Layer w10: U10.14@4390,3570.31 4479.69,3570.31 v2(4480,3570) ; v2(4904,4182) 4959.62,4182 4972.2,4169.41 4972.2,4152.54 U1.13@4973.27,4151.47
  Bottom Layer w10: v2(4480,3570) 4557,3647 4892,3647 4937,3692 4937,4162 4917,4182 v2(4904,4182)
NetU1_15: U1.15 U10.12 | length 1235.6
  Top Layer w10: U10.12@4361.46,3522.09 4361.46,3495.86 4367.31,3490 v2(4445,3490) ; v2(4904,4158) 4906,4158 4924.65,4139.35 U1.15@4924.65,4118.6
  Bottom Layer w10: v2(4445,3490) 4445,3580 4540,3675 4880,3675 4923,3718 4923,4141.16 4906.16,4158 v2(4904,4158)
NetU1_16: U1.16 U10.11 | length 1214.7
  Top Layer w10: U10.11@4341.77,3522.09 4341.77,3483.23 4355,3470 v2(4420,3470) ; v2(4888,4102) 4923.8,4102 U1.16@4924.65,4102.85
  Bottom Layer w10: v2(4420,3470) 4420,3605 4522,3707 4877,3707 4909,3739 4909,4087.64 4894.64,4102 v2(4888,4102)
NetU1_18: U1.18 Y1.1 | length 710.6
  Top Layer w10: Y1.1@4381.48,4473.53 4386.01,4469 v2(4417,4469) ; v2(4890.35,4071.35) U1.18@4924.65,4071.35
  Bottom Layer w10: v2(4417,4469) 4418,4470 4491.71,4470 v2(4890.35,4071.35)
NetU1_28: U1.28 U8.4 | length 1128.6
  Top Layer w10: U8.4@4155.35,4493.39 4155.35,4555.35 4185,4585 v2(4235,4585) ; v2(4891,3917) 4893.11,3914.89 4923.63,3914.89 U1.28@4924.65,3913.87
  Bottom Layer w10: v2(4235,4585) 4891,3929 v2(4891,3917)
NetU1_29: U1.29 U8.1 | length 1103.2
  Top Layer w10: U8.1@4214.41,4493.39 4214.41,4566.57 v2(4215,4567.16) ; v2(4874,3904) 4897,3881 U1.29@4957.52,3881
  Bottom Layer w10: v2(4215,4567.16) 4874,3908.16 v2(4874,3904)
NetU1_30: U1.30 U8.2 | length 1169.1
  Top Layer w10: U8.2@4194.72,4493.39 4194.72,4552.57 v2(4195,4552.84) ; v2(4857,3886) 4857,3885 4904,3838 4954,3838 4973.27,3857.27 U1.30@4973.27,3881
  Bottom Layer w10: v2(4195,4552.84) 4195,4548 v2(4857,3886)
NetU1_31: U1.31 U8.3 | length 1206.7
  Top Layer w10: v2(4175,4535) v2(4175,4535) U8.3@4175.04,4493.39 ; v2(4857,3846) 4887,3816 4962,3816 4989.02,3843.02 U1.31@4989.02,3881
  Bottom Layer w10: v2(4175,4535) 4175,4528 v2(4857,3846)
NetU1_32: U1.32 U8.30 | length 1115.9
  Top Layer w10: v2(4235.26,4426.5) 4237.11,4428.35 U8.30@4250.75,4428.35 ; v2(4872,3798) 4880,3790 4963,3790 5004.76,3831.76 U1.32@5004.76,3881
  Bottom Layer w10: v2(4235.26,4426.5) 4240.7,4426.5 4869.2,3798 v2(4872,3798)
NetU1_34: U1.34 U8.25 | length 1211.9
  Top Layer w10: U8.25@4240,4330 4254,4330 4278.77,4305.23 4737.77,4305.23 v2(4738,4305) ; U1.34@5036.26,3881 5036.26,3849.74 v2(5037,3849)
  Bottom Layer w10: v2(4738,4305) 4894,4305 4979,4220 4979,3907 v2(5037,3849)
NetU1_35: U1.35 U8.26 | length 1281.5
  Top Layer w10: U8.26@4240,4349.69 4271.53,4349.69 4299.42,4321.8 4586.31,4321.8 4587.52,4323 v2(4760,4323) ; U1.35@5052.01,3881 5053.07,3879.94 5053.07,3858.16 5054.84,3856.39 5054.84,3841.16 v2(5058,3838)
  Bottom Layer w10: v2(4760,4323) 4923,4323 4994,4252 4994,3936 5058,3872 v2(5058,3838)
NetU1_51: U1.51 U2.7 | length 714.5
  Top Layer w10: U1.51@5195.12,4039.86 5304.89,4039.86 v2(5308.02,4042.98) ; v2(5533,4389) v2(5533,4389) U2.7@5661.11,4389.05
  Bottom Layer w10: v2(5308.02,4042.98) 5309,4042 5362,4042 5533,4213 v2(5533,4389)
NetU1_52: U1.52 U2.6 | length 647.7
  Top Layer w10: U1.52@5195.12,4055.61 5295.41,4055.61 5302.8,4063 v2(5322,4063) ; v2(5505,4341) 5506,4340 5660.16,4340 U2.6@5661.11,4339.05
  Bottom Layer w10: v2(5322,4063) 5334,4063 5505,4234 v2(5505,4341)
NetU1_53: U1.53 U2.5 | length 575.7
  Top Layer w10: U1.53@5195.12,4071.35 5287.35,4071.35 5299,4083 v2(5308,4083) ; v2(5483,4290) 5483.95,4289.05 U2.5@5661.11,4289.05
  Bottom Layer w10: v2(5308,4083) 5483,4258 v2(5483,4290)
NetU1_54: U1.54 U2.3 | length 398.4
  Top Layer w10: U1.54@5195.12,4087.1 5273.1,4087.1 5319,4133 5319,4324 5334.05,4339.05 U2.3@5377.25,4339.05
NetU1_55: U1.55 U2.2 | length 421.4
  Top Layer w10: U1.55@5195.12,4102.85 5248.85,4102.85 5291,4145 5291,4351 5329.05,4389.05 U2.2@5377.25,4389.05
NetU8_29: U8.29 Y1.3 | length 66.6
  Top Layer w10: U8.29@4250.75,4408.66 4251.73,4407.68 4315.11,4407.68 Y1.3@4316.42,4408.98
power_in: C16.1 C20.1 C22.1 J1.A4-B9 J1.B4-A9 R12.2 R14.1 TP4.1 U6.1 U6.3 U7.1 U7.3 U12.4 U12.5 U12.6 | length 5010.7
  Top Layer w10: TP4.1@5294,3478 5294,3541 ; U12.6@5760.65,3431.91 U12.5@5780.33,3431.91 5824.09,3431.91 5825,3431
  Top Layer w20: v4(3991,3850) 4054.5,3850 C22.1@4056,3848.5 4056.05,3848.45 4147.77,3848.45 U7.1@4147.82,3848.4 4149.63,3846.59 4182.41,3846.59 4196,3833 4196,3797 4174.41,3775.41 4149.63,3775.41 U7.3@4147.82,3773.6 ; v4(4831,3737) 5026,3542 5295,3542 ; 5294,3541 5295,3542 ; v3(5545,4064) 5545.49,4064.49 v3(5577.49,4064.49) v3(5613.51,4064.49) J1.B4-A9@5707.24,4064.49 ; v3@5547,3876 v3@5547.49,3875.51 ; v3(5547.49,3876.49) v3(5578.49,3876.49) 5614.49,3876.49 v3(5615,3877) 5705.76,3877 J1.A4-B9@5707.24,3875.51 ; R14.1@5607.13,4832.2 v4(5649.8,4832.2) ; 5621,3580 5621,3553.72 5609.28,3542 5295,3542 ; U6.1@5670,3572.6 5669.62,3572.22 5621,3572.22 5621,3631 v4(5620,3632) 5633.59,3645.59 5668.19,3645.59 U6.3@5670,3647.4 ; C20.1@5769.69,3574.04 5769.69,3573.61 5775.64,3567.65 C16.1@5775.64,3497 v4(5825,3497) ; 5789,3373 v4(5825,3373) v4(5825,3411) 5825,3431 v4(5825,3451) v4(5825,3497) ; R12.2@5894.33,3497 v4(5825,3497)
  Bottom Layer w20: v4(3991,3850) 4456.9,3850 4568.06,3738.84 4829.16,3738.84 v4(4831,3737) ; v3(5547.49,3876.49) v3(5578.49,3876.49) ; v3@5547.49,3878 5545,3880.49 v3(5545,4064) 5545.49,4064.49 v3(5577.49,4064.49) v3(5613.51,4064.49) ; v3@5579,3877 v3(5615,3877) 5620,3872 5620,3698 ; v3@5613,4065 5613,4795.41 v4(5649.8,4832.2) ; v4(5621,3594) 5621,3631 v4(5620,3632) 5620,3698 ; v4(5825,3373) v4(5825,3411) v4(5825,3451) v4(5825,3497) 5825,3657 5784,3698 5620,3698
Q_N: C50.2 L5.2 U10.6 | length 1011.8
  Top Layer w8.86: v2(3599.62,3339.19) 3599.83,3339.4 3605.51,3339.4 3609.53,3343.43 3626.45,3343.43 3631.64,3348.62 3631.64,3361.64 C50.2@3635,3365 ; L5.2@3674.41,3365 L5.2@3687.41,3378 ; v2(4200.4,3592.08) 4200.71,3592.08 4202.79,3590 U10.6@4273.86,3590
  Top Layer w17.7: C50.2@3633.61,3362.83 3635,3364.21 C50.2@3635,3365 3635,3365.79 3636.39,3367.17 3676.59,3367.17 L5.2@3687.41,3378
  Bottom Layer w8.86: v2(3599.62,3339.19) 3599.62,3339.38 3585.94,3353.06 3585.94,3473.34 3705.43,3592.83 3947.86,3592.83 3948.98,3591.71 4199.23,3591.71 4199.38,3591.86 4200.18,3591.86 v2(4200.4,3592.08)
Q_O_N: L5.1 U9.15 | length 91.5
  Top Layer w8.86: L5.1@3744.59,3378 L5.1@3755.54,3367.05
  Top Layer w17.7: L5.1@3755.54,3367.05 3755.54,3356.25 3767.48,3344.31 U9.15@3815.84,3344.31
Q_O_P: L3.1 U9.16 | length 90.6
  Top Layer w8.86: L3.1@3743.59,3291 L3.1@3754.54,3301.95 ; 3798.8,3321.54 3799.11,3321.54 3801.38,3323.81 3816.27,3323.81 U9.16@3816.46,3324
  Top Layer w17.7: L3.1@3754.54,3301.95 3754.54,3308.95 3767.14,3321.54 3798.8,3321.54
Q_P: C49.2 L3.2 U10.5 | length 1048.8
  Top Layer w8.86: v2(3587,3326.57) 3587.31,3326.57 3587.88,3326 3588.38,3326 3592.46,3321.91 3611.86,3321.91 3616.52,3326.57 3626.45,3326.57 3631.64,3321.38 3631.64,3308.36 C49.2@3635,3305 ; v2(4198,3610) U10.5@4273.54,3610
  Top Layer w17.7: C49.2@3633.61,3307.17 3635,3305.79 C49.2@3635,3305 ; C49.2@3635,3304.21 3636.39,3302.83 3675.46,3302.83 3686.41,3291.87 L3.2@3686.41,3291
  Bottom Layer w8.86: v2(3587,3326.57) 3587,3326.88 3582.34,3331.53 3582.34,3332.81 3569.08,3346.08 3569.08,3480.32 3698.45,3609.69 3954.84,3609.69 3955.97,3608.57 4192.25,3608.57 4193.46,3609.78 4197.78,3609.78 v2(4198,3610)
res_out_N: B2.4 U9.21 | length 52.5
  Top Layer w8.86: B2.4@3879.41,3210 3879.41,3211.97 3879.9,3212.46 3880.08,3212.46 3887.57,3219.95 3887.57,3239.75 3883.16,3244.17 U9.21@3883.16,3257.23
res_out_P: B2.3 U9.22 | length 49.3
  Top Layer w8.86: U9.22@3902.84,3257.23 3902.84,3244.17 3901.43,3242.75 3901.43,3215.54 3905,3211.97 B2.3@3905,3210
rf_ref_N: C27.2 U9.9 | length 149.4
  Top Layer w8.86: U9.9@3902.84,3410.77 3902.84,3423.83 3901.43,3425.25 3901.43,3525.07 3906.62,3530.26 3918.59,3530.26 3927.87,3539.54 C27.2@3927.87,3541.57
rf_ref_P: C26.2 U9.10 | length 153.4
  Top Layer w8.86: C26.2@3852.87,3541.57 3864.19,3530.26 3879.38,3530.26 3884.57,3525.07 3884.57,3425.25 3883.16,3423.83 U9.10@3883.16,3410.77
rfoutA_N: C25.1 U8.13 | length 371.7
  Top Layer w8.86: C25.1@3878.9,4644.46 3886.96,4636.39 3902.78,4636.39 3907.97,4631.2 3907.97,4471.19 3988.69,4390.47 4038.52,4390.47 4039.93,4389.06 U8.13@4051.02,4389.06
rfoutA_P: C24.1 U8.12 | length 343.7
  Top Layer w8.86: C24.1@3953.9,4644.46 3945.83,4636.39 3930.02,4636.39 3924.83,4631.2 3924.83,4478.17 3995.67,4407.33 4038.52,4407.33 4039.93,4408.74 U8.12@4051.02,4408.74
rfoutB_N: C27.1 U8.15 | length 860.4
  Top Layer w8.86: C27.1@3931.87,3588.63 3922.57,3597.93 3906.63,3597.93 3901.44,3603.12 3901.44,4224.44 4028.1,4351.1 4038.52,4351.1 4039.93,4349.69 U8.15@4051.02,4349.69
rfoutB_P: C26.1 U8.14 | length 888.2
  Top Layer w8.86: C26.1@3854,3589 3863.15,3598.15 3879.39,3598.15 3884.58,3603.34 3884.58,4231.43 4021.11,4367.96 4038.52,4367.96 4039.93,4369.37 U8.14@4051.02,4369.37
rset: R19.2 U8.22 | length 84.6
  Top Layer w10: U8.22@4175.04,4304.41 4175.12,4304.33 4175.12,4279.88 4193.15,4261.85 4193.15,4240.91 4199.96,4234.1 R19.2@4203.9,4234.1
run: R10.1 SW2.1 SW2.2 U1.26 | length 1217.6
  Top Layer w10: SW2.1@4924.21,3212 SW2.2@5130.91,3212 ; U1.26@4924.65,3945.37 4958.06,3945.37 4984.43,3919 v2(5080,3919) ; SW2.2@5130.91,3212.6 5181.1,3212.6 5210,3241.5 R10.1@5210,3308 5209,3309 v2(5171,3309)
  Bottom Layer w10: v2(5080,3919) 5080,3400 v2(5171,3309)
SCL: R8.1 R23.1 TP1.1 U1.3 U3.B2 U4.7 U11.8 | length 3187.3
  Top Layer w10: U3.B2@3209.37,4684.69 3209.44,4684.75 3339.16,4684.75 R23.1@3340,4685.59 3404.41,4685.59 v2(3405,4685) ; U11.8@3239.61,4805.47 3240.08,4805 v2(3280,4805) ; TP1.1@5077,4450 5077,4443 v2(5110,4410) ; U1.3@5130.75,4151.47 5130.75,4295.25 5110.59,4315.41 R8.1@5110.59,4360 5110.59,4409.41 v2(5110,4410) ; U4.7@5553.82,4720 5420,4720 v2(5110,4410)
  Bottom Layer w10: v2(3280,4805) 3280,4696 3291,4685 v2(3405,4685) 4835,4685 v2(5110,4410)
SDA: R9.1 R25.1 TP3.1 U1.2 U3.A2 U4.8 U11.7 | length 3140.2
  Top Layer w10: U3.A2@3209.37,4704.37 3279,4704.37 ; U11.7@3239.61,4785.79 3239.7,4785.69 3339.9,4785.69 R25.1@3340,4785.59 3379.41,4785.59 v2(3380,4785) ; 3278,4704.37 3279,4704.37 ; v2(3300,4705) 3299.37,4704.37 3279,4704.37 ; U1.2@5146.5,4151.47 5146.5,4297.5 5159.41,4310.41 R9.1@5159.41,4360 5159.41,4409.41 v2(5160,4410) 5160,4425 5308,4573 ; TP3.1@5346,4534 5308,4572 5308,4573 ; U4.8@5553.82,4704.25 5439.25,4704.25 5308,4573
  Bottom Layer w10: v2(3300,4705) 3379.88,4705 3380,4705.12 3385,4705.12 ; v2(3380,4785) 3380,4710.12 3385,4705.12 ; v2(5160,4410) 4864.88,4705.12 3385,4705.12
swclk: J5.1 U1.24 | length 1042.3
  Top Layer w10: J5.1@4494,3130.34 4505.15,3141.5 4505.15,3185.15 4661,3341 4661,3685 4815,3839 4815,3897 4893.8,3975.8 4923.58,3975.8 U1.24@4924.65,3976.87
swdio: J5.3 U1.25 | length 947.1
  Top Layer w10: J5.3@4691,3123.42 4691,3684.15 4832,3825.15 4832,3890 4902.06,3960.06 4923.58,3960.06 U1.25@4924.65,3961.12
temp: C37.1 C38.2 U8.19 | length 146.3
  Top Layer w10: U8.19@4115.98,4304.41 4115.98,4283.02 4143.68,4255.32 4143.68,4234.39 C38.2@4146.08,4232 4146.08,4180.69 C37.1@4138.9,4173.51
temp_int: U1.4 U3.C2 | length 2171.7
  Top Layer w10: U3.C2@3209.37,4665 3263.16,4665 v2(3265,4666.84) ; v2(5087.38,4267.62) 5115,4240 U1.4@5115,4151.47
  Bottom Layer w10: v2(3265,4666.84) 4688.16,4666.84 v2(5087.38,4267.62)
usb_dm: J1.A7 J1.B7 R4.2 | length 409.6
  Top Layer w10: R4.2@5466.73,3940 R4.2@5466.89,3940.16
  Top Layer w11.2: R4.2@5466.73,3940 v2@5579.84,3940 ; v2(5580,3940.16) 5687.29,3940.16 J1.B7@5706.93,3940.17 ; v2(5580.31,3979.68) J1.A7@5710,3979.68
  Bottom Layer w11.2: v2(5580,3940.16) 5580.31,3940.47 v2(5580.31,3979.68)
usb_dp: J1.A6 J1.B6 R5.2 | length 383.5
  Top Layer w11.2: R5.2@5466.73,4000 5467.06,3999.68 5610,3999.68 5709.69,3999.68 J1.B6@5710,3999.37 ; v2(5610,3960) J1.A6@5710,3960
  Bottom Layer w11.2: v2(5610,3960) v2(5610,4000)
USB_N: R5.1 U1.47 | length 253.7
  Top Layer w11.2: U1.47@5195.12,3977.5 5420.5,3977.5 5427.06,3984.06 5427.06,3994.77 5432.28,4000 R5.1@5433.27,4000
USB_P: R4.1 U1.46 | length 251.4
  Top Layer w11.2: U1.46@5196,3961 5420.5,3961 5427.06,3954.44 5427.06,3945.23 5432.28,3940 R4.1@5433.27,3940
vcom: C41.1 C42.2 U8.23 | length 179.2
  Top Layer w10: U8.23@4194.72,4304.41 4194.8,4304.33 4194.8,4285.04 C42.2@4264.84,4215 4264.84,4167.09 C41.1@4273.9,4158.04
vref: C39.1 C40.2 U8.24 | length 206.1
  Top Layer w10: U8.24@4214.41,4304.41 4243,4304.41 4268.89,4278.51 C39.1@4318.9,4278.51 4320.35,4277.06 4320.35,4251.65 4329,4243 4346.72,4243 4352.58,4237.14 4352.58,4222.42 C40.2@4360,4215
vtune: C36.1 R18.2 U8.20 | length 675
  Top Layer w10: U8.20@4135.67,4304.41 4135.67,4290.33 v2(4158,4268) ; v2(4207,4608) 4244.76,4645.76 R18.2@4244.76,4690 4244.76,4749.76 C36.1@4255,4760
  Bottom Layer w10: v2(4158,4268) 4111,4268 4074,4305 4074,4475 v2(4207,4608)
pads on no net: B1.6 B2.6 J1.A8 J1.B8 U1.9 U1.14 U1.17 U1.27 U1.37 U1.38 U1.39 U5.4 U6.4 U7.4 U8.5 U9.12 U10.9 U10.10 U11.2 U11.3 U11.9 U11.13

## Polygon pours and split planes (outlines as drawn)
GND on GND1 "GND_L02_P000" (solid, pour order 0): 2383.86,4924.31 2388.88,4924.31 2448.82,4984.25 2452.76,4980.31 5913.39,4980.31 5972.44,4921.26 5972.44,3035.43 5913.39,2976.38 5909.45,2980.32 2448.82,2980.32 2385.83,3043.31
GND on GND2 "GND_L03_P001" (solid, pour order 1): 2383.86,4924.31 2388.88,4924.31 2448.82,4984.25 2452.76,4980.31 5913.39,4980.31 5972.44,4921.26 5972.44,3035.43 5913.39,2976.38 5909.45,2980.32 2448.82,2980.32 2385.83,3043.31

## Other copper
GND1:
  rectangle net GND: 4066.93,4334.65 4208.66,4472.44
  rectangle net GND: 3815.93,3271.65 3952.76,3400.54
  rectangle net GND: 4263.78,3523.62 4401.57,3641.73
GND2:
  rectangle net GND: 4070.87,4330.71 4212.6,4468.5
  rectangle net GND: 3830.71,3275.59 3952.76,3385.83
  rectangle net GND: 4283.46,3527.56 4397.64,3629.92

## Silkscreen, mask and mechanical layers (free items; w line width, h text height)
Top Overlay:
  rectangle: 2860,3156 3228,3211
  text "gnd" at 3562,4900 h30
  text "boot" at 4986.38,4679.29 h30
  text "SDA" at 5215,4522 h30
  text "SCL" at 5037,4493 h30
  text "+3V" at 4840,4346 h30
  text "gnd" at 5819,4308 h30
  text "gnd" at 4325,4027 h30
  text "+3VA" at 4439.13,3986.38 h30
  text "+3VA" at 4082,3914 h30
  text "+3V" at 5482.44,3750.16 h30
  text "+5V" at 3721,3737 h30
  text "gnd" at 4013.94,3681.41 h30
  text "Power" at 5836.77,3533.62 h30
  text "Power" at 5107,3466 h30
  text "+5.5" at 4752,3421 h30
  text "swdio" at 4627,3287 h30
  text "run" at 4987,3287 h30
  text "tx" at 5353,3287 h30
  text "rx" at 5456,3287 h30
  text "FYDP V1.1" at 2866,3231 h30
  text "EJK" at 3141,3231 h30
  text "gnd" at 5675,3138 h30
  text "+5V" at 4247,3072 h30
  text "swclk" at 4269,3001 h30
  text "gnd" at 4137,2998 h30
Top Solder:
  rectangle: 3140,4775 3241,4896
  region: 3938.9,4738.51 3938.9,4795.51 3925.9,4795.51 3925.9,4738.51
  region: 3913.9,4755.51 3913.9,4781.51 3899.9,4781.51 3899.9,4755.51
  rectangle: 3038,4768 3100,4798
  rectangle: 2362.2,3425.2 3562.99,4606.3
Mechanical 1:
  lines w1.97: 2362,3006 ccw(c2412,3006) 2412,2956 5943,2956 ccw(c5943,3006) 5993,3006 5993,4950 ccw(c5943,4950) 5943,5000 2412,5000 ccw(c2412,4950) 2362,4950 2362,4922 2362,3006